# Altium PCB PCB4.PcbDoc (part 3 of 3)
Units mm, origin at the board's own origin, x right, y up, seen from the top; angles counter-clockwise.
Board outline 75.87 x 93.52 mm, 2 copper layers (Top Layer, Bottom Layer); 206 components, 153 nets, 707 pads, 254 vias.
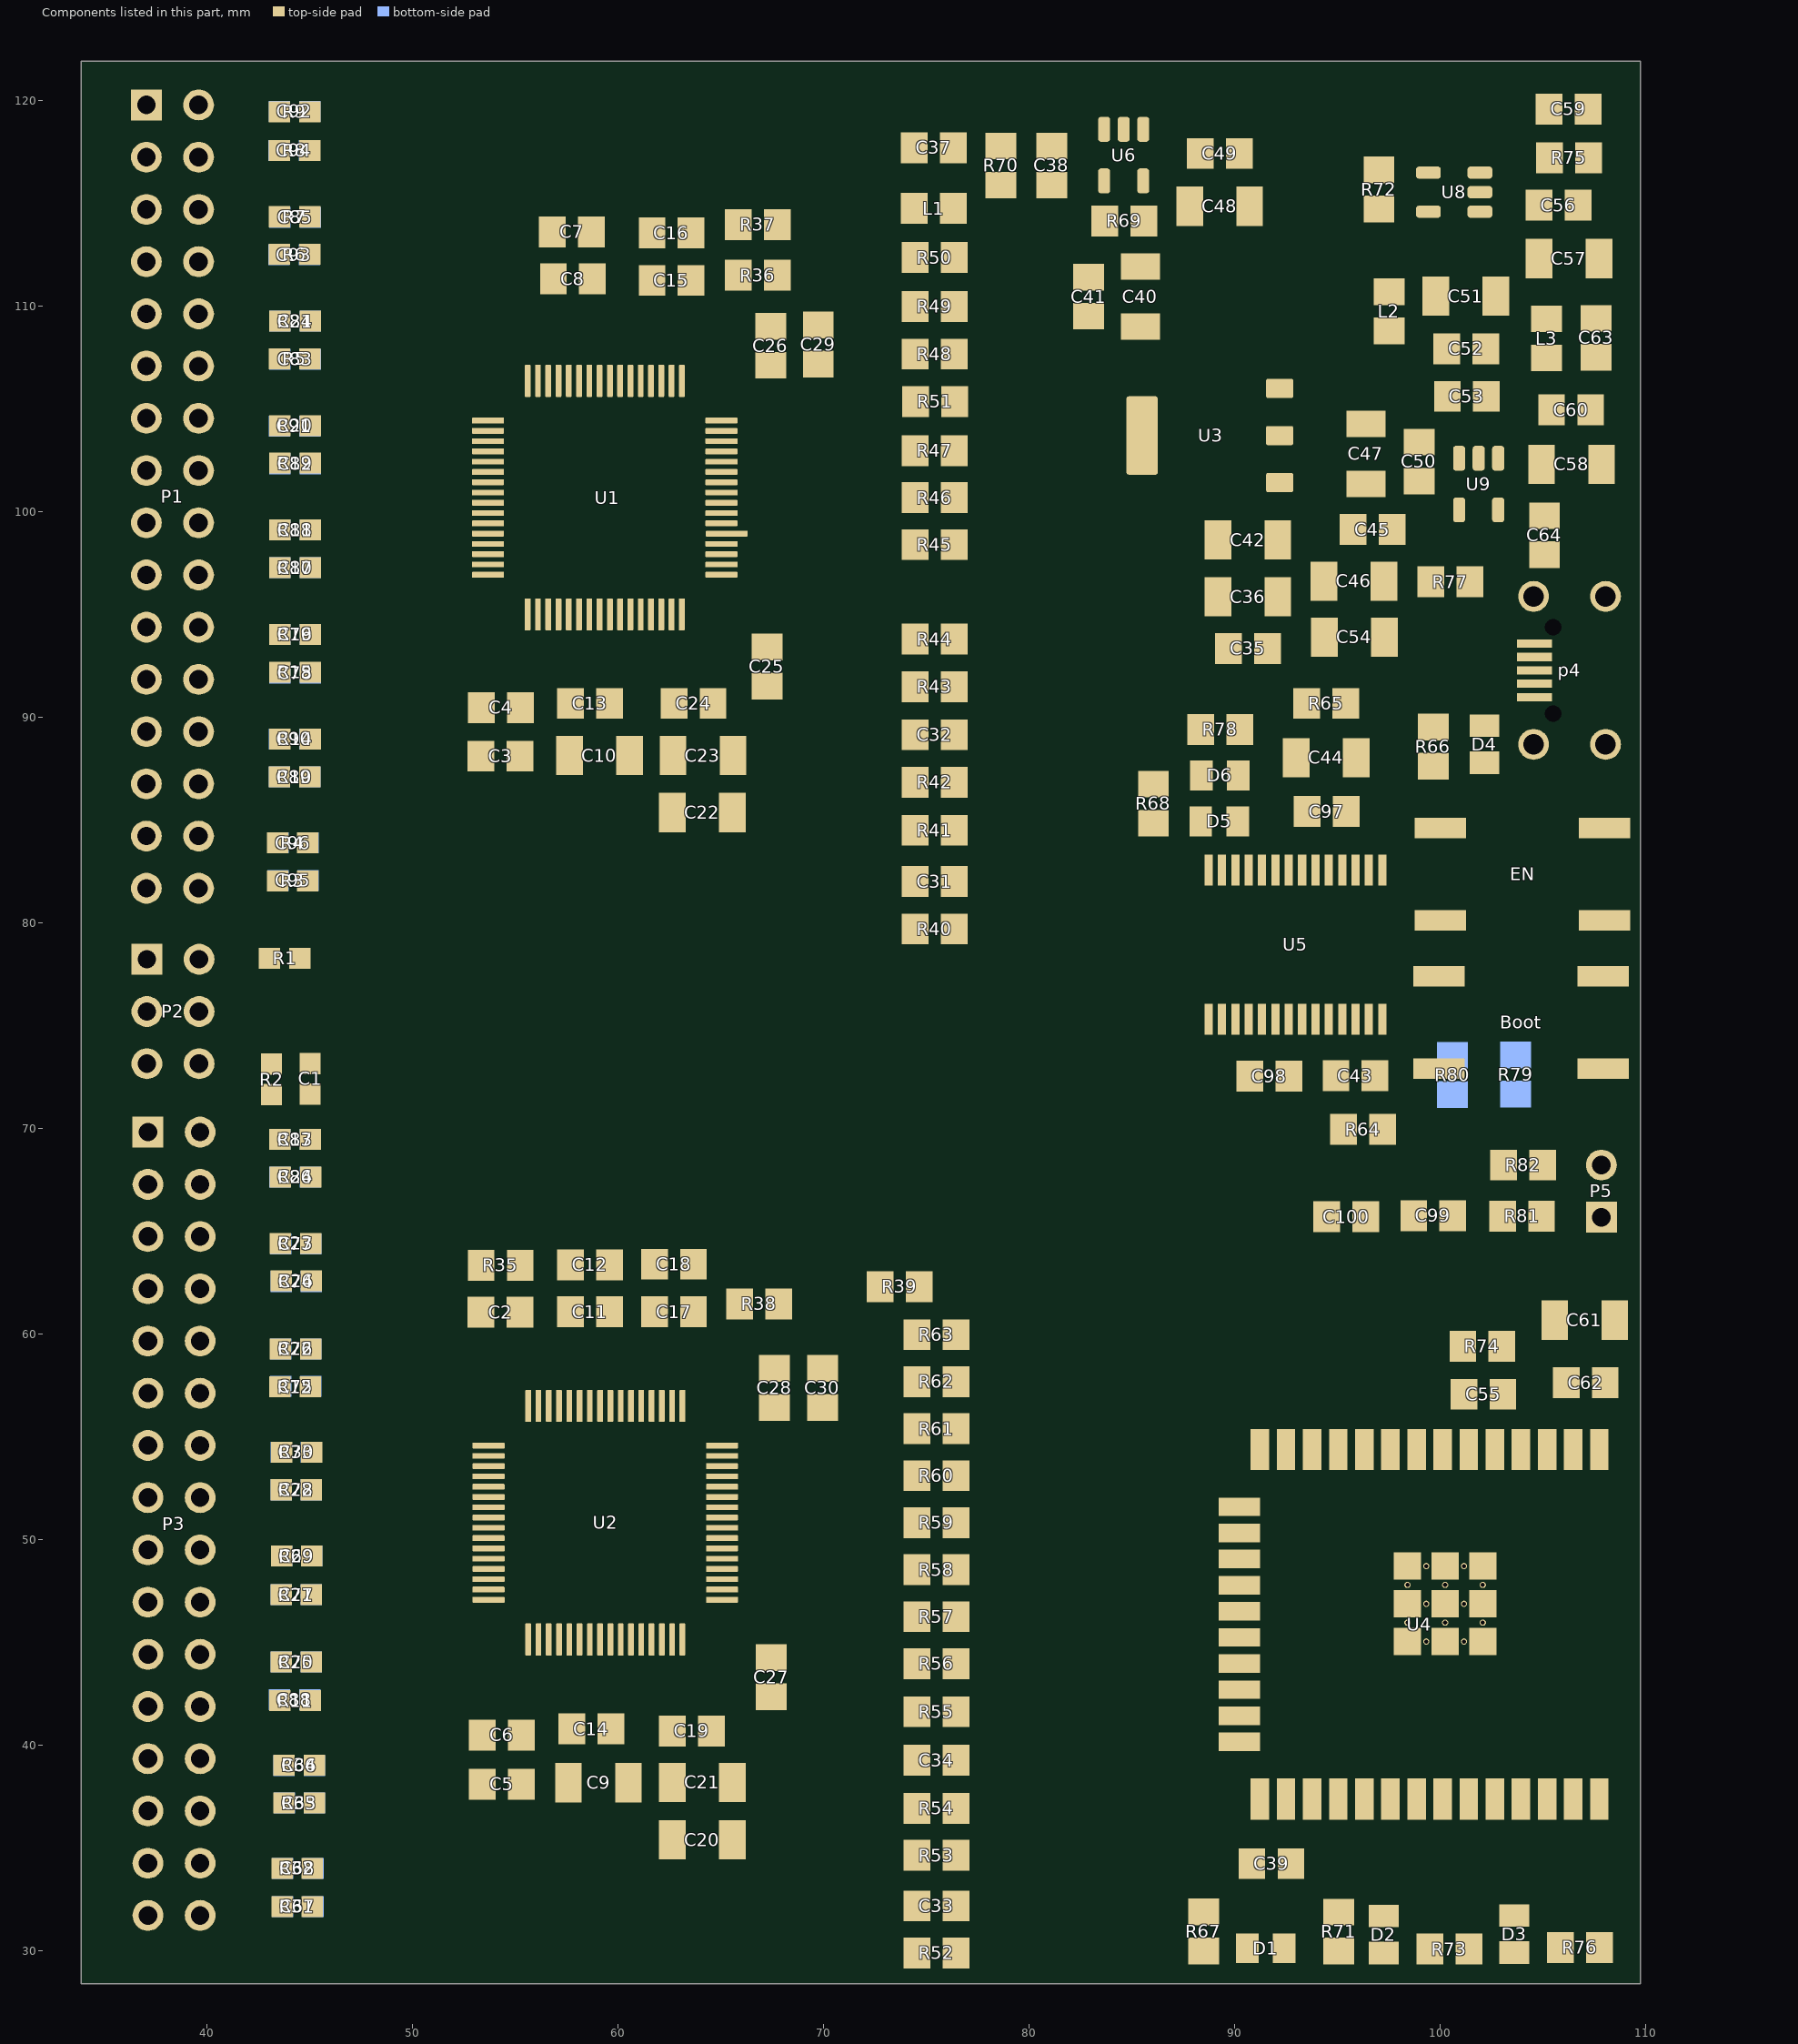
[diagram p3: the components of this part, seen from the top]

## Other copper (continued)
Bottom Layer:
  pour cut-out: 44.157,81.278 44.157,82.806 44.155,82.804 42.724,82.804 42.724,81.28
  pour cut-out: 44.157,83.107 44.157,84.635 44.155,84.633 42.724,84.633 42.724,83.109
  pour cut-out: 44.233,86.307 44.233,87.835 44.231,87.833 42.801,87.833 42.801,86.309
  pour cut-out: 44.233,88.161 44.233,89.689 44.231,89.687 42.801,89.687 42.801,88.163
  pour cut-out: 44.259,91.362 44.259,92.89 44.257,92.888 42.826,92.888 42.826,91.364
  pour cut-out: 44.259,93.241 44.259,94.769 44.257,94.767 42.826,94.767 42.826,93.243
  pour cut-out: 44.259,96.493 44.259,98.021 44.257,98.019 42.826,98.019 42.826,96.495
  pour cut-out: 44.259,98.321 44.259,99.849 44.257,99.847 42.826,99.847 42.826,98.323
  pour cut-out: 44.259,101.547 44.259,103.075 44.257,103.073 42.826,103.073 42.826,101.549
  pour cut-out: 44.233,103.376 44.233,104.904 44.231,104.902 42.801,104.902 42.801,103.378
  pour cut-out: 44.259,106.627 44.259,108.155 44.257,108.153 42.826,108.153 42.826,106.629
  pour cut-out: 44.259,108.481 44.259,110.009 44.257,110.007 42.826,110.007 42.826,108.483
  pour cut-out: 44.208,111.707 44.208,113.235 44.206,113.233 42.775,113.233 42.775,111.709
  pour cut-out: 44.259,113.536 44.259,115.064 44.257,115.062 42.826,115.062 42.826,113.538
  pour cut-out: 44.208,116.787 44.208,118.315 44.206,118.313 42.775,118.313 42.775,116.789
  pour cut-out: 44.233,118.692 44.233,120.22 44.231,120.218 42.801,120.218 42.801,118.694
  pour cut-out: 44.386,31.367 44.386,32.895 44.384,32.893 42.953,32.893 42.953,31.369
  pour cut-out: 44.386,33.221 44.386,34.749 44.384,34.747 42.953,34.747 42.953,33.223
  pour cut-out: 44.462,36.396 44.462,37.924 44.46,37.922 43.029,37.922 43.029,36.398
  pour cut-out: 44.459,38.225 44.459,39.753 44.457,39.751 43.026,39.751 43.026,38.227
  pour cut-out: 44.233,41.425 44.233,42.953 44.231,42.951 42.801,42.951 42.801,41.427
  pour cut-out: 44.311,43.254 44.311,44.782 44.309,44.78 42.878,44.78 42.878,43.256
  pour cut-out: 44.309,46.531 44.309,48.059 44.307,48.057 42.877,48.057 42.877,46.533
  pour cut-out: 44.335,48.41 44.335,49.938 44.333,49.936 42.902,49.936 42.902,48.412
  pour cut-out: 44.309,51.636 44.309,53.164 44.307,53.162 42.877,53.162 42.877,51.638
  pour cut-out: 44.309,53.465 44.309,54.993 44.307,54.991 42.877,54.991 42.877,53.467
  pour cut-out: 44.284,56.665 44.284,58.193 44.282,58.191 42.851,58.191 42.851,56.667
  pour cut-out: 44.284,58.494 44.284,60.022 44.282,60.02 42.851,60.02 42.851,58.496
  pour cut-out: 44.308,61.771 44.308,63.299 44.306,63.297 42.875,63.297 42.875,61.773
  pour cut-out: 44.284,63.6 44.284,65.128 44.282,65.126 42.851,65.126 42.851,63.602
  pour cut-out: 44.257,66.851 44.257,68.379 44.255,68.377 42.824,68.377 42.824,66.853
  pour cut-out: 44.257,68.68 44.257,70.208 44.255,70.206 42.824,70.206 42.824,68.682

## Silkscreen, mask and mechanical layers (free items; w line width, h text height)
Top Overlay:

## Text inside footprints (layer, text, board x,y; h text height)
P5: Top Overlay "TX" at 108.712,71.196 h1 r180; Top Overlay "RX" at 108.661,63.627 h1 r180
U4: Mechanical 13 "ANTENNA" at 111.487,51.856 h1.27 r270